# Altium PCB Stencil.PcbDoc (part 1 of 2)
Units mm, origin at the board's own origin, x right, y up, seen from the top; angles counter-clockwise.
Board outline 189.61 x 201.8 mm, 2 copper layers (Top Layer, Bottom Layer); 282 components, 0 nets, 889 pads, 215 vias.
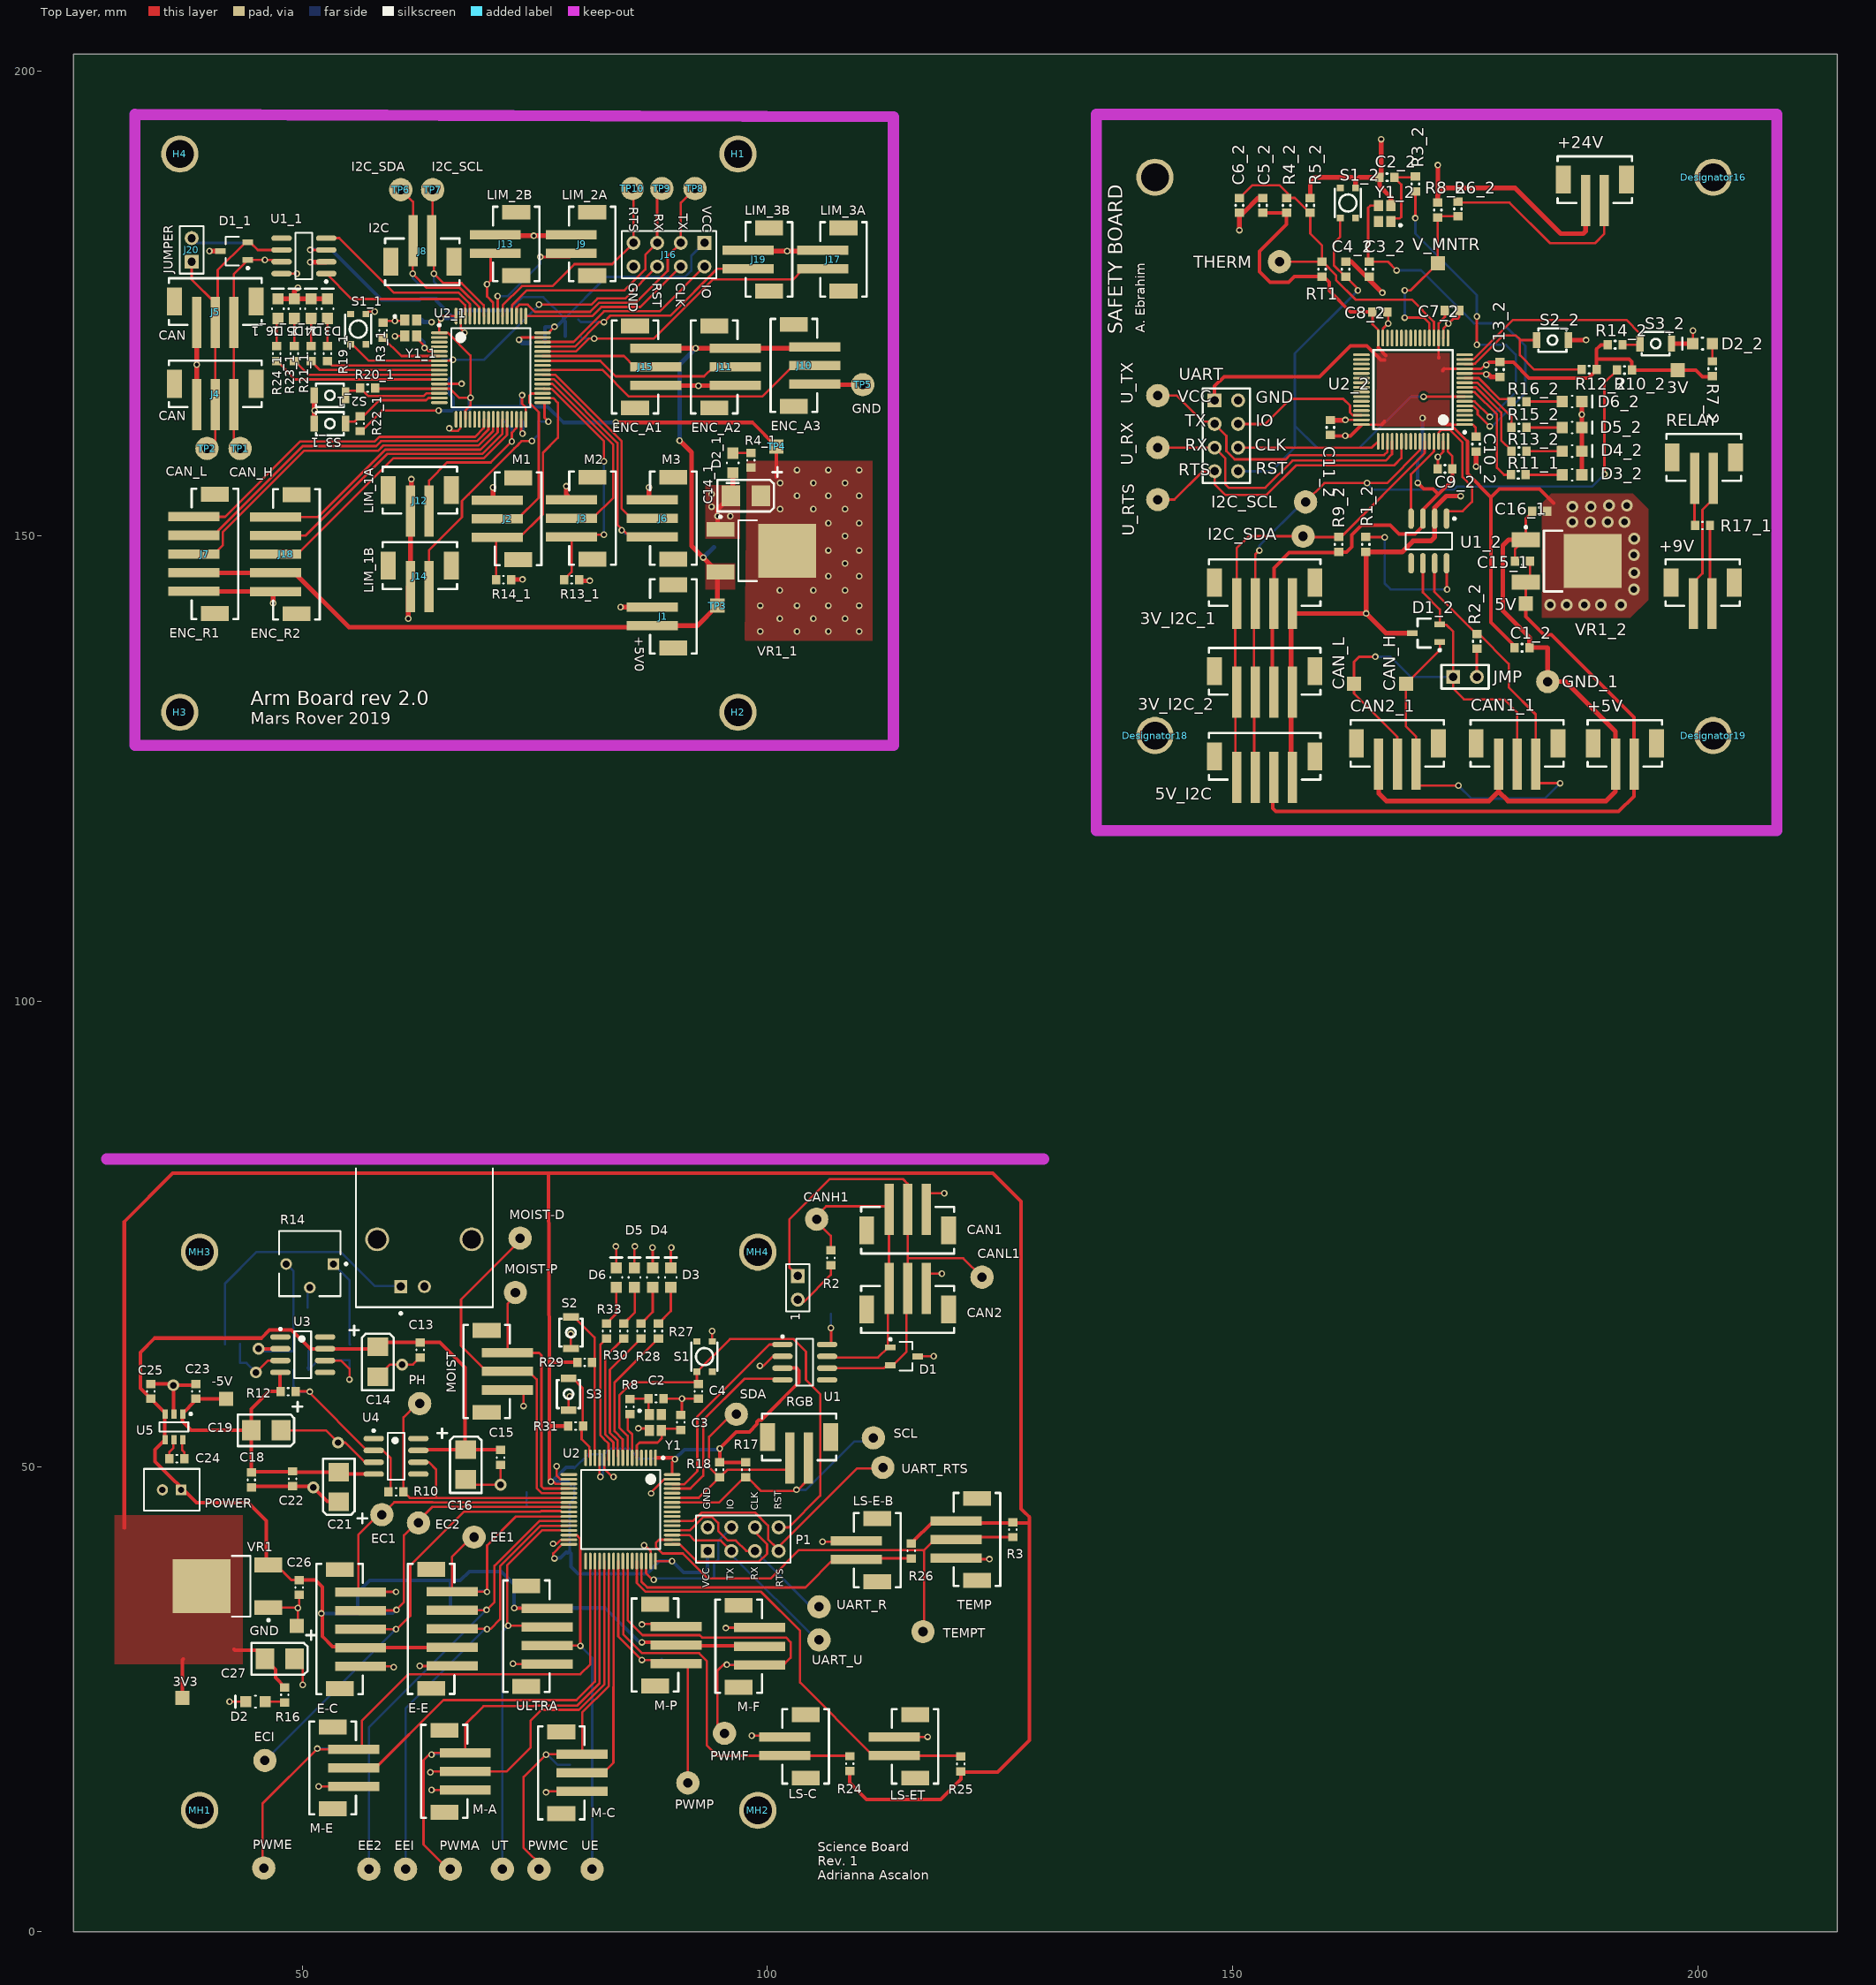
[diagram p0: Top Layer view]
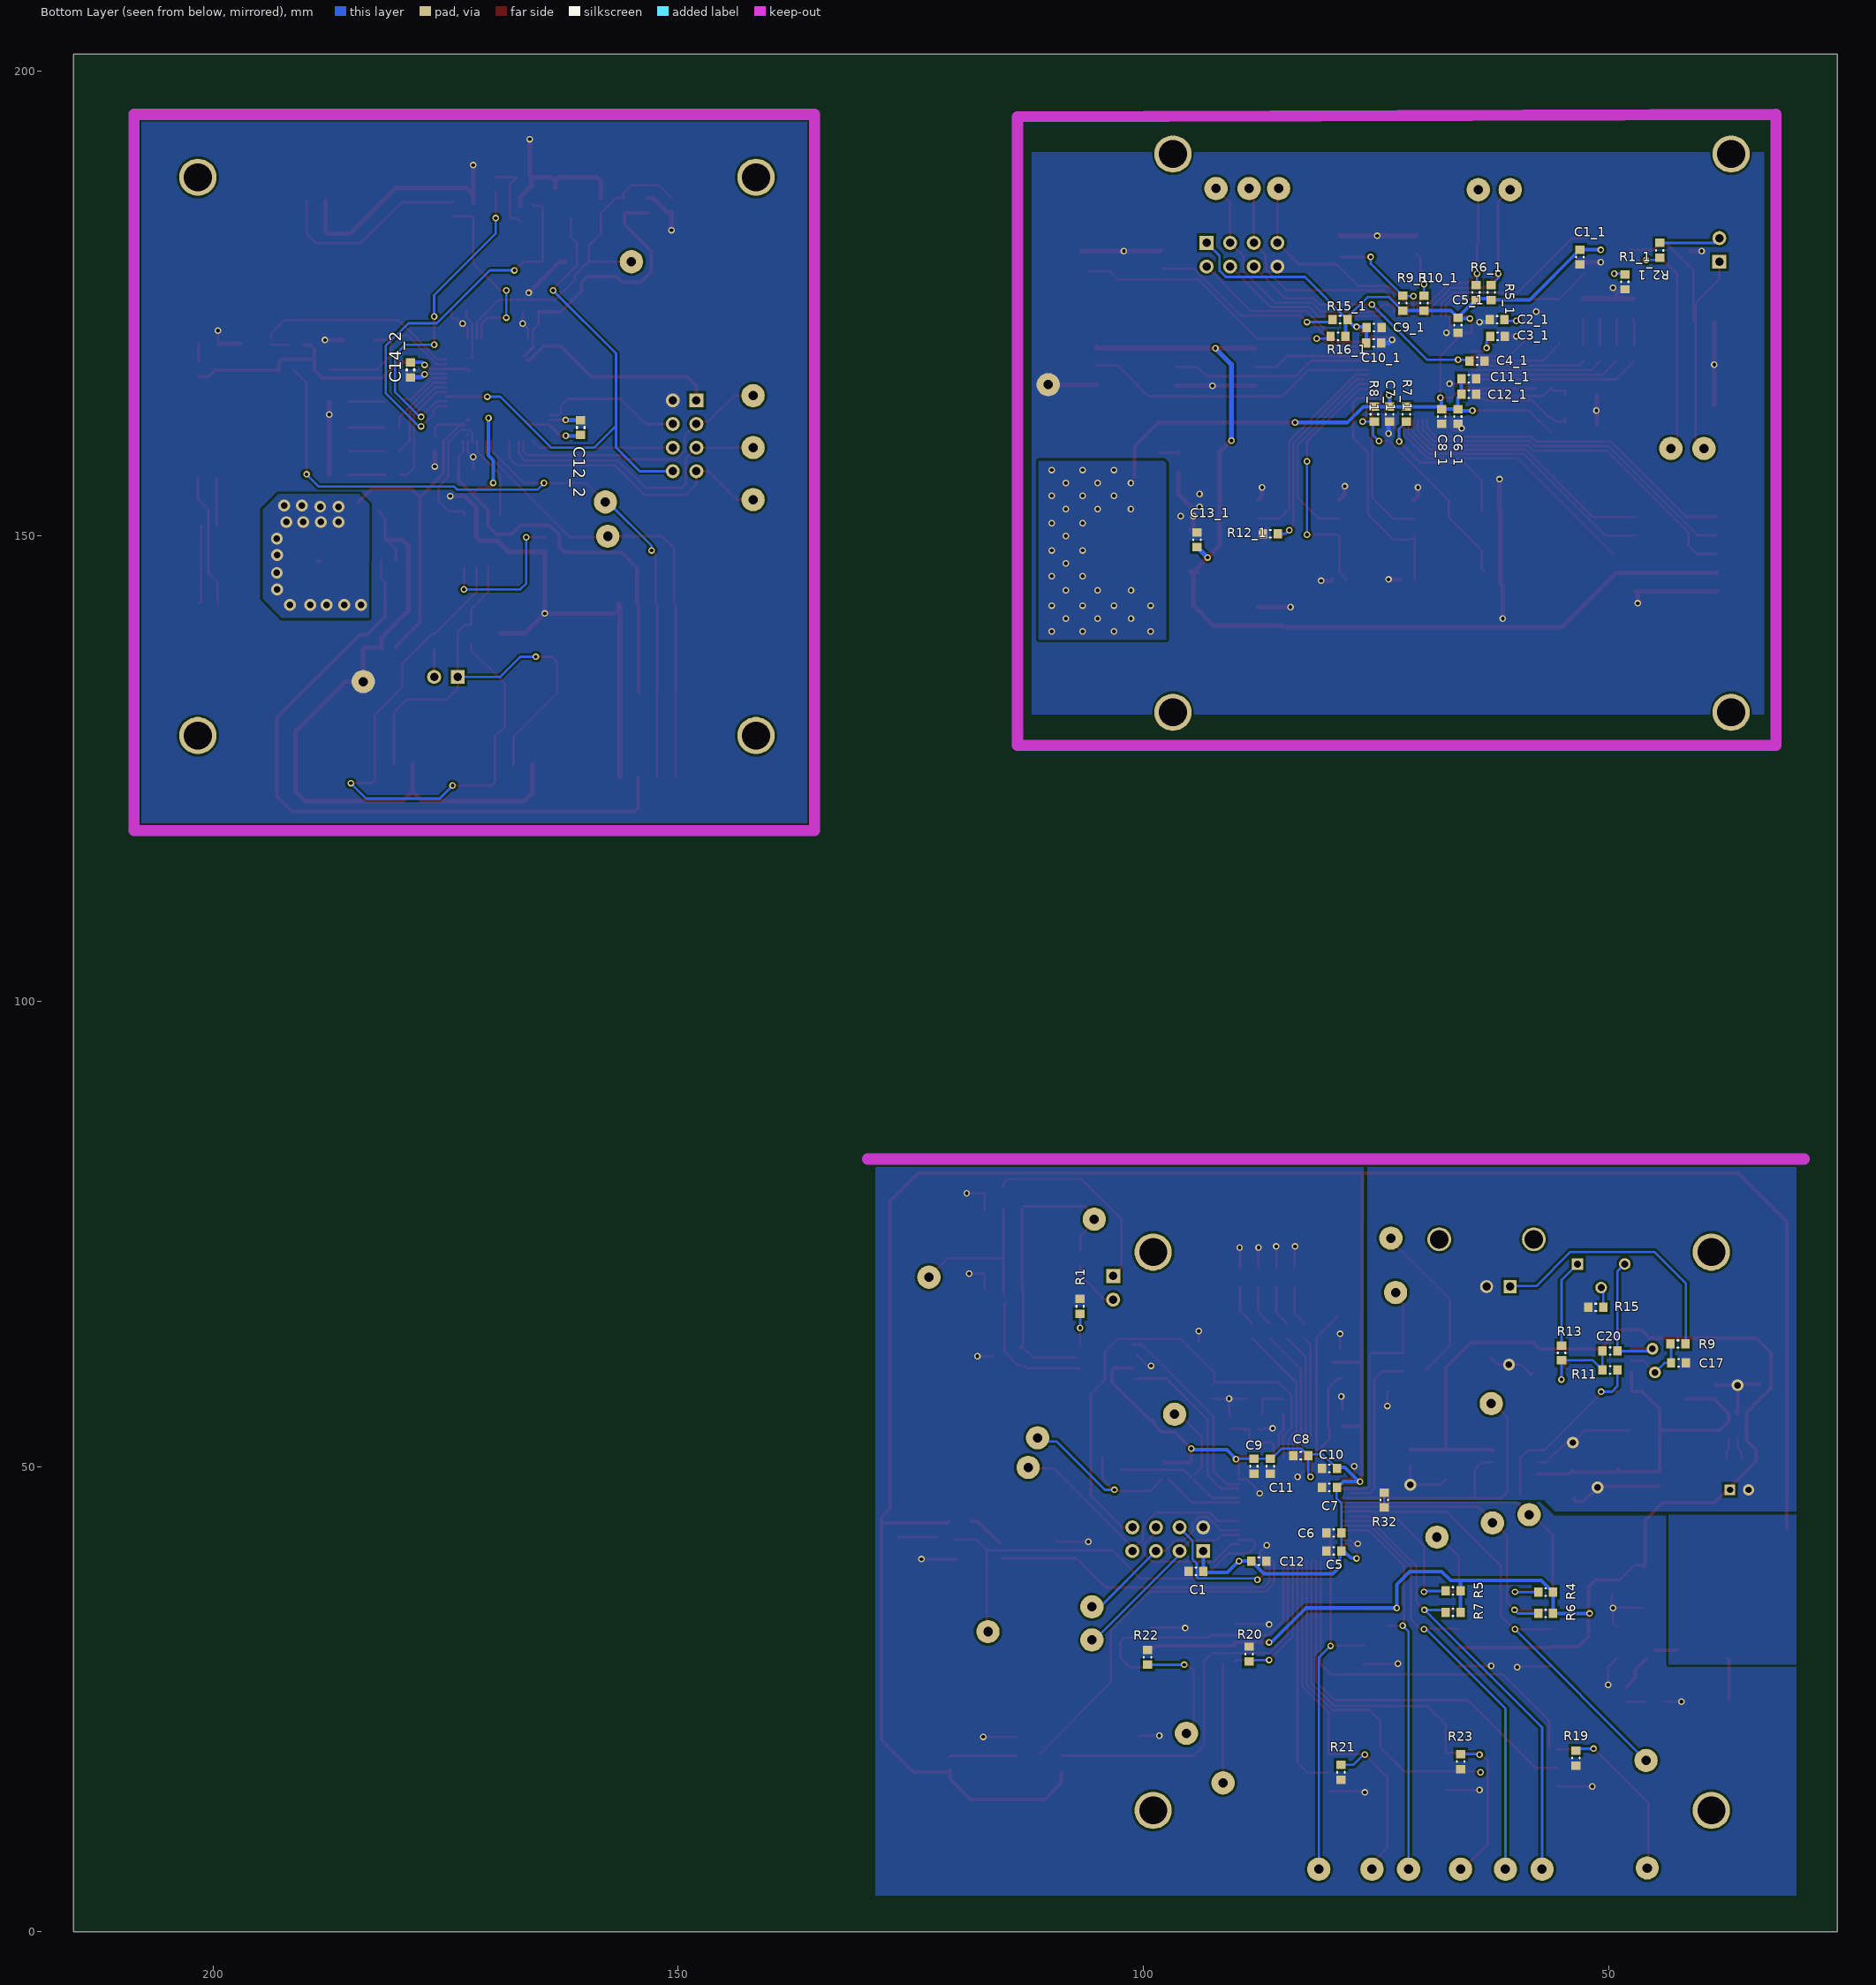
[diagram p1: Bottom Layer view, seen from below]

## Layer stack, top to bottom
Top Solder: solder mask 0.0102, Solder Resist, Dk 3.5
Top Layer: signal copper 0.0356
Dielectric 1: dielectric 0.32, FR-4, Dk 4.8
Bottom Layer: signal copper 0.0356
Bottom Solder: solder mask 0.0102, Solder Resist, Dk 3.5

## Board outline
25.4,0 215.011,0 215.011,201.803 25.4,201.803

## Design rules (kind name [scope] priority, off if disabled: settings)
Clearance [All] p1: gap=0.254 ignorepadtopadclearanceinfootprint=FALSE except(0: Arc-Hole Track-Hole SMDPad-Hole THPad-Hole Via-Hole Fill-Hole Poly-Hole Region-Hole Text-Hole)
PolygonConnect [All] p1: connectstyle=Relief reliefconductorwidth=0.254 reliefentries=4 polygonreliefangle="90 Angle" airgapwidth=0.254
RoutingVias [All] p1: holewidth=0.711 width=1.27 viastyle="Through Hole" minholewidth=0.711 minwidth=1.27 maxholewidth=0.711 maxwidth=1.27
SolderMaskExpansion [All] p1: expansion=0.102
Width [All] p1: maxlimit=0.254 minlimit=0.254 preferedwidth=0.254
30 further rules are at their usual default settings.

## Components (designator, comment, footprint, x,y, rotation, side; value= is the part's Value field where it differs from the comment)
1 "Header 2" HDR1X2 103.251,70.485 r270 top
3V "3V_TP" TESTPOINT#1 197.838,167.836 r90 top (schematic designator TP6)
3V3 "TESTPOINT_SMD" TESTPOINT#1 37.084,25.146 r90 top
3V_I2C_1 "CON_4M_PH_TOP_SMT" JST-B4B-SM4-TB 153.439,147.498 r180 top (schematic designator J5)
3V_I2C_2 "CON_4M_PH_TOP_SMT" JST-B4B-SM4-TB 153.439,137.973 r180 top (schematic designator J6)
5V "5V_TP" TESTPOINT#1 181.514,142.748 r0 top (schematic designator 2)
5V_I2C "CON_4M_PH_TOP_SMT" JST-B4B-SM4-TB 153.439,128.829 r180 top (schematic designator J7)
+5V "PH TOP SMD" JST-B2B-SM4-TB 192.15,130.226 r180 top (schematic designator J3)
+9V "PH TOP SMD" JST-B2B-SM4-TB 200.521,147.498 r180 top (schematic designator J8)
+24V "PH TOP SMD" JST-B2B-SM4-TB 188.932,190.805 r180 top (schematic designator J4)
-5V "TESTPOINT_SMD" TESTPOINT#1 41.783,57.277 r90 top
C1 "CAP_0.1uF_16V_0603" CAPC0603(1608)55_N 94.361,38.735 r180 bottom value=0.1uF
C1_1 "CAP_0.1uF_16V_0603" CAPC0603(1608)55_N 53.086,179.991 r90 bottom value=0.1uF (schematic designator C1)
C1_2 "CAP_0.1uF_16V_0603" CAPC0603(1608)55_N 181.112,137.999 r180 top value=0.1uF (schematic designator C1)
C2 "CAP_15pF_0603" CAPC0603(1608)55_N 88.011,57.288 r180 top locked value=15pF
C2_1 "CAP_15pF_0603" CAPC0603(1608)55_N 61.989,173.25 r180 bottom value=15pF (schematic designator C2)
C2_2 "CAP_15pF_0603" CAPC0603(1608)55_N 166.596,188.566 r0 top value=15pF (schematic designator C2)
C3 "CAP_15pF_0603" CAPC0603(1608)55_N 90.671,54.747 r270 top locked value=15pF
C3_1 "CAP_15pF_0603" CAPC0603(1608)55_N 61.938,171.472 r0 bottom value=15pF (schematic designator C3)
C3_2 "CAP_15pF_0603" CAPC0603(1608)55_N 164.691,178.689 r90 top value=15pF (schematic designator C3)
C4 "CAP_0.1uF_16V_0603" CAPC0603(1608)55_N 92.583,58.088 r90 top locked value=0.1uF
C4_1 "CAP_0.1uF_16V_0603" CAPC0603(1608)55_N 64.135,168.815 r0 bottom value=0.1uF (schematic designator C4)
C4_2 "CAP_0.1uF_16V_0603" CAPC0603(1608)55_N 162.151,178.689 r270 top value=0.1uF (schematic designator C4)
C5 "CAP_0.1uF_16V_0603" CAPC0603(1608)55_N 79.535,40.943 r0 bottom value=0.1uF
C5_1 "CAP_0.1uF_16V_0603" CAPC0603(1608)55_N 66.205,172.669 r90 bottom value=0.1uF (schematic designator C5)
C5_2 "CAP_1uF_16V_0603" CAPC0603(1608)55_N 153.261,185.547 r270 top value=1uF (schematic designator C5)
C6 "CAP_0.1uF_16V_0603" CAPC0603(1608)55_N 79.535,42.848 r0 bottom value=0.1uF
C6_1 "CAP_0.1uF_16V_0603" CAPC0603(1608)55_N 66.205,162.846 r90 bottom value=0.1uF (schematic designator C6)
C6_2 "CAP_10nF_0603" CAPC0603(1608)55_N 150.721,185.547 r90 top value=10nF (schematic designator C6)
C7 "CAP_0.1uF_16V_0603" CAPC0603(1608)55_N 80.01,47.756 r0 bottom value=0.1uF
C7_1 "CAP_0.1uF_16V_0603" CAPC0603(1608)55_N 73.533,163.1 r90 bottom value=0.1uF (schematic designator C7)
C7_2 "CAP_0.1uF_16V_0603" CAPC0603(1608)55_N 173.581,174.244 r180 top value=0.1uF (schematic designator C7)
C8 "CAP_4.7uF_0603" CAPC0603(1608)55_N 83.091,51.164 r180 bottom value=4.7uF
C8_1 "CAP_4.7uF_0603" CAPC0603(1608)55_N 67.945,162.846 r90 bottom value=4.7uF (schematic designator C8)
C8_2 "CAP_0.1uF_16V_0603" CAPC0603(1608)55_N 165.834,174.079 r180 top value=0.1uF (schematic designator C8)
C9 "CAP_0.1uF_16V_0603" CAPC0603(1608)55_N 88.138,50.038 r270 bottom value=0.1uF
C9_1 "CAP_0.1uF_16V_0603" CAPC0603(1608)55_N 75.222,172.415 r0 bottom value=0.1uF (schematic designator C9)
C9_2 "CAP_0.1uF_16V_0603" CAPC0603(1608)55_N 172.819,157.226 r0 top value=0.1uF (schematic designator C9)
C10 "CAP_4.7uF_0603" CAPC0603(1608)55_N 80.01,49.788 r180 bottom value=4.7uF
C10_1 "CAP_0.1uF_16V_0603" CAPC0603(1608)55_N 75.26,170.764 r0 bottom value=0.1uF (schematic designator C10)
C10_2 "CAP_4.7uF_0603" CAPC0603(1608)55_N 176.171,159.893 r90 top value=4.7uF (schematic designator C10)
C11 "CAP_10nF_0603" CAPC0603(1608)55_N 86.36,50.038 r90 bottom value=10nF
C11_1 "CAP_10nF_0603" CAPC0603(1608)55_N 65.024,166.91 r0 bottom value=10nF (schematic designator C11)
C11_2 "CAP_0.1uF_16V_0603" CAPC0603(1608)55_N 160.5,161.671 r270 top value=0.1uF (schematic designator C11)
C12 "CAP_1uF_16V_0603" CAPC0603(1608)55_N 87.592,39.838 r0 bottom value=1uF
C12_1 "CAP_1uF_16V_0603" CAPC0603(1608)55_N 65.024,165.259 r0 bottom value=1uF (schematic designator C12)
C12_2 "CAP_0.1uF_16V_0603" CAPC0603(1608)55_N 160.5,161.662 r270 bottom value=0.1uF (schematic designator C12)
C13 "CAP_0.1uF_50V_0603" CAPC0603(1608)55_N 62.676,62.533 r90 top value=0.1uF
C13_1 "CAP_0.33uF_16V_0603" CAPC0603(1608)55_N 94.234,149.606 r270 bottom value=0.33uF (schematic designator C13)
C13_2 "CAP_10nF_0603" CAPC0603(1608)55_N 178.729,167.894 r90 top value=10nF (schematic designator C13)
C14 "CAP_10uF_0603_POL" AVX-CAPC3528_V 58.104,61.263 r270 top value=10uF
C14_1 "CAP_10uF_0603_POL" AVX-CAPC3528_V 97.676,154.337 r180 top value=10uF (schematic designator C14)
C14_2 "CAP_1uF_16V_0603" CAPC0603(1608)55_N 178.788,167.874 r90 bottom value=1uF (schematic designator C14)
C15 "CAP_0.1uF_50V_0603" CAPC0603(1608)55_N 71.312,50.976 r90 top value=0.1uF
C15_1 "CAP_0.33uF_16V_0603" CAPC0603(1608)55_N 181.161,147.32 r0 top value=0.33uF (schematic designator C15)
C16 "CAP_10uF_0603_POL" AVX-CAPC3528_V 67.564,50.214 r270 top value=10uF
C16_1 "CAP_10uF_0603" CAPC0603(1608)55_N 183.004,152.677 r0 top value=10uF (schematic designator C16)
C17 "CAP_2.2nF_0603" CAPC0603(1608)55_N 42.483,61.136 r0 bottom value=2.2nF
C18 "CAP_0.1uF_50V_0603" CAPC0603(1608)55_N 44.515,48.563 r90 top value=0.1uF
C19 "CAP_10uF_0603_POL" AVX-CAPC3528_V 46.115,53.897 r180 top value=10uF
C20 "CAP_1uF_16V_0603" CAPC0603(1608)55_N 49.849,62.406 r0 bottom value=1uF
C21 "CAP_10uF_0603_POL" AVX-CAPC3528_V 53.913,47.801 r90 top value=10uF
C22 "CAP_0.1uF_50V_0603" CAPC0603(1608)55_N 48.96,48.69 r90 top value=0.1uF
C23 "CAP_1uF_16V_0603" CAPC0603(1608)55_N 38.546,58.088 r90 top value=1uF
C24 "CAP_1uF_16V_0603" CAPC0603(1608)55_N 36.514,50.849 r0 top value=1uF
C25 "CAP_1uF_16V_0603" CAPC0603(1608)55_N 33.72,58.088 r270 top value=1uF
C26 "CAP_0.33uF_16V_0603" CAPC0603(1608)55_N 49.657,37.006 r90 top value=0.33uF
C27 "10uF" AVX-CAPC3528_V 47.574,29.337 r180 top
CAN1 "PH TOP SMD" JST-B3B-SM4-TB 115.062,72.898 r0 top
CAN1_1 "PH TOP SMD" JST-B3B-SM4-TB 180.577,130.226 r180 top (schematic designator J1)
CAN2 "PH TOP SMD" JST-B3B-SM4-TB 115.062,64.389 r0 top locked
CAN2_1 "PH TOP SMD" JST-B3B-SM4-TB 167.7,130.226 r180 top (schematic designator J2)
CAN_H "TESTPOINT_SMD" TESTPOINT#1 168.628,134.112 r0 top (schematic designator TP1)
CAN_L "TESTPOINT_SMD" TESTPOINT#1 163.04,134.112 r90 top (schematic designator TP2)
CANH1 "TESTPOINT_LOOP" TESTPOINT_LOOP#1 105.283,76.581 r0 top
CANL1 "TESTPOINT_LOOP" TESTPOINT_LOOP#1 123.063,70.358 r90 top
D1 "TVS_DIODE_CAN" TVS_DIODE_CAN 114.681,61.849 r0 top
D1_1 "TVS_DIODE_CAN" TVS_DIODE_CAN 42.672,180.626 r180 top (schematic designator D1)
D1_2 "TVS_DIODE_CAN" TVS_DIODE_CAN 170.787,139.573 r180 top (schematic designator D1)
D2 "DIO_LED_R" LED_0805_LINE 44.958,24.736 r180 top
D2_1 "DIO_LED_R" LED_0805_LINE 96.266,157.861 r270 top (schematic designator D2)
D2_2 "DIO_LED_R" LED_0805_LINE 200.505,170.688 r180 top (schematic designator D2)
D3 "DIO_LED_Y" LED_0805_LINE 89.611,70.315 r90 top
D3_1 "DIO_LED_Y" LED_0805_LINE 52.705,174.437 r90 top (schematic designator D3)
D3_2 "DIO_LED_Y" LED_0805_LINE 186.486,156.591 r0 top (schematic designator D3)
D4 "DIO_LED_G" LED_0805_LINE 87.656,70.315 r90 top
D4_1 "DIO_LED_G" LED_0805_LINE 50.927,174.437 r90 top (schematic designator D4)
D4_2 "DIO_LED_G" LED_0805_LINE 186.486,159.131 r0 top (schematic designator D4)
D5 "DIO_LED_G" LED_0805_LINE 85.7,70.315 r90 top
D5_1 "DIO_LED_G" LED_0805_LINE 49.149,174.437 r90 top (schematic designator D5)
D5_2 "DIO_LED_G" LED_0805_LINE 186.486,161.671 r0 top (schematic designator D5)
D6 "DIO_LED_G" LED_0805_LINE 83.745,70.315 r90 top
D6_1 "DIO_LED_G" LED_0805_LINE 47.371,174.437 r90 top (schematic designator D6)
D6_2 "DIO_LED_G" LED_0805_LINE 186.486,164.461 r0 top (schematic designator D6)
Designator16 "Comment" MOUNTING_HOLE#1 201.647,188.566 r0 top
Designator18 "Comment" MOUNTING_HOLE#1 141.647,128.566 r0 top
Designator19 "Comment" MOUNTING_HOLE#1 201.647,128.566 r0 top
E-C "PH TOP SMD" JST-B5B-SM4-TB 51.511,32.529 r270 top
E-E "PH TOP SMD" JST-B5B-SM4-TB 61.341,32.56 r270 top
EC1 "TESTPOINT_LOOP" TESTPOINT_LOOP#1 58.547,44.831 r0 top
EC2 "TESTPOINT_LOOP" TESTPOINT_LOOP#1 62.484,43.942 r0 top
ECI "TESTPOINT_LOOP" TESTPOINT_LOOP#1 45.974,18.415 r0 top
EE1 "TESTPOINT_LOOP" TESTPOINT_LOOP#1 68.453,42.418 r90 top
EE2 "TESTPOINT_LOOP" TESTPOINT_LOOP#1 57.15,6.731 r90 top
EEI "TESTPOINT_LOOP" TESTPOINT_LOOP#1 61.087,6.731 r90 top
GND "TESTPOINT_SMD" TESTPOINT#1 49.403,32.893 r90 top
GND_1 "GND_TP" TESTPOINT_LOOP#1 183.868,134.366 r0 top (schematic designator TP5)
H1 "MOUNTING_HOLES" MOUNTING_HOLE#2 170.434,117.983 r0 top
H2 "MOUNTING_HOLES" MOUNTING_HOLE#3 38.791,148.9 r0 top
H3 "MOUNTING_HOLES" MOUNTING_HOLE#4 159.893,117.983 r0 top
H4 "MOUNTING_HOLES" MOUNTING_HOLE#5 38.791,148.9 r0 top
I2C_SCL "I2C_SCL_TP" TESTPOINT_LOOP#1 157.833,153.67 r0 top (schematic designator TP8)
I2C_SDA "I2C_SDA_TP" TESTPOINT_LOOP#1 157.579,149.987 r0 top (schematic designator TP7)
J1 "+5V0" JST-B2B-SM4-TB 92.38,141.367 r90 top
J2 "M1" JST-B3B-SM4-TB 75.692,151.863 r90 top
J3 "M2" JST-B3B-SM4-TB 83.693,151.924 r90 top
J4 "CAN" JST-B3B-SM4-TB 40.64,168.866 r180 top
J5 "CAN" JST-B3B-SM4-TB 40.64,177.705 r180 top
J6 "M3" JST-B3B-SM4-TB 92.38,151.924 r90 top
J7 "ENC_R1" JST-B5B-SM4-TB 43.104,148.082 r90 top
J8 "I2C" JST-B2B-SM4-TB 62.894,176.983 r0 top
J9 "LIM_2A" JST-B2B-SM4-TB 83.653,181.404 r90 top
J10 "ENC_A3" JST-B3B-SM4-TB 100.33,168.347 r270 top
J11 "ENC_A2" JST-B3B-SM4-TB 91.77,168.18 r270 top
J12 "LIM_1A" JST-B2B-SM4-TB 62.627,157.436 r180 top
J13 "LIM_2B" JST-B2B-SM4-TB 75.489,181.404 r90 top
J14 "LIM_1B" JST-B2B-SM4-TB 62.627,149.329 r180 top
J15 "ENC_A1" JST-B3B-SM4-TB 83.261,168.18 r270 top
J16 "HEADER 4X2" HEADER_2X4 93.218,181.515 r180 top
J17 "LIM_3A" JST-B2B-SM4-TB 110.668,179.737 r90 top
J18 "ENC_R2" JST-B5B-SM4-TB 51.867,148.051 r90 top
J19 "LIM_3B" JST-B2B-SM4-TB 102.667,179.737 r90 top
J20 "JUMPER" HDR1X2 38.1,179.483 r90 top
JMP "Header 2" HDR1X2 173.708,134.874 r0 top (schematic designator 1)
LS-C "PH TOP SMD" JST-B2B-SM4-TB 106.604,19.923 r90 top locked
LS-E-B "PH TOP SMD" JST-B2B-SM4-TB 114.3,41.021 r90 top
LS-ET "PH TOP SMD" JST-B2B-SM4-TB 118.364,19.923 r90 top locked
M-A "PH TOP SMD" JST-B3B-SM4-TB 62.759,17.242 r270 top
M-C "PH TOP SMD" JST-B3B-SM4-TB 75.332,17.086 r270 top
M-E "PH TOP SMD" JST-B3B-SM4-TB 50.757,17.613 r270 top
M-F "PH TOP SMD" JST-B3B-SM4-TB 94.401,30.689 r270 top locked
M-P "PH TOP SMD" JST-B3B-SM4-TB 85.412,30.816 r270 top
MH1 "MOUNTING_HOLES" MOUNTING_HOLE#6 34.671,11.048 r0 top
MH2 "MOUNTING_HOLES" MOUNTING_HOLE#7 150.956,8.048 r0 top
MH3 "MOUNTING_HOLES" MOUNTING_HOLE#8 134.956,14.048 r0 top
MH4 "MOUNTING_HOLES" MOUNTING_HOLE#9 140.33,8.66 r0 top
MOIST "PH TOP SMD" JST-B3B-SM4-TB 67.31,60.224 r270 top
MOIST-D "TESTPOINT_LOOP" TESTPOINT_LOOP#1 73.406,74.549 r90 top
MOIST-P "TESTPOINT_LOOP" TESTPOINT_LOOP#1 72.898,68.707 r90 top
P1 "HEADER 4X2" HEADER_2X4 93.572,40.924 r0 top locked
PH "TESTPOINT_LOOP" TESTPOINT_LOOP#1 62.611,56.769 r90 top
POWER "PH TOP TH" JST-B2B-PHSK 35.957,47.498 r180 top
PWMA "TESTPOINT_LOOP" TESTPOINT_LOOP#1 65.913,6.731 r90 top
PWMC "TESTPOINT_LOOP" TESTPOINT_LOOP#1 75.438,6.731 r90 top
PWME "TESTPOINT_LOOP" TESTPOINT_LOOP#1 45.847,6.858 r90 top
PWMF "TESTPOINT_LOOP" TESTPOINT_LOOP#1 95.377,21.336 r90 top
PWMP "TESTPOINT_LOOP" TESTPOINT_LOOP#1 91.44,16.002 r90 top
R1 "RES_0R_0603" RESC0603(1608)_N 106.807,67.221 r90 bottom value=0R
R1_1 "RES_0R_0603" RESC0603(1608)_N 48.26,177.324 r270 bottom value=0R (schematic designator R1)
R1_2 "RES_0R_0603" RESC0603(1608)_N 164.31,149.098 r270 top value=0R (schematic designator R1)
R2 "RES_120R_0603" RESC0603(1608)_N 106.807,72.428 r270 top value=120R
R2_1 "RES_120R_0603" RESC0603(1608)_N 44.511,180.715 r90 bottom value=120R (schematic designator R2)
R2_2 "RES_120R_0603" RESC0603(1608)_N 176.248,138.684 r270 top value=120R (schematic designator R2)
R3 "RES_4K7_0603" RESC0603(1608)_N 126.365,43.218 r90 top value=4K7
R3_1 "RES_0R_0603" RESC0603(1608)_N 58.674,172.117 r90 top value=0R (schematic designator R3)
R3_2 "RES_0R_0603" RESC0603(1608)_N 169.644,187.833 r90 top value=0R (schematic designator R3)
R4 "RES_10K_0603" RESC0603(1608)_N 56.769,36.498 r180 bottom value=10K
R4_1 "RES_100R_0603" RESC0603(1608)_N 98.203,158.147 r270 top value=100R (schematic designator R4)
R4_2 "RES_78K7_0603" RESC0603(1608)_N 155.801,185.547 r270 top value=78K7 (schematic designator R4)
R5 "RES_10K_0603" RESC0603(1608)_N 66.722,36.633 r180 bottom value=10K
R5_1 "RES_4K7_0603" RESC0603(1608)_N 62.611,176.181 r270 bottom value=4K7 (schematic designator R5)
R5_2 "RES_84K5_0603" RESC0603(1608)_N 158.341,185.547 r270 top value=84K5 (schematic designator R5)
R6 "RES_10K_0603" RESC0603(1608)_N 56.769,34.213 r180 bottom value=10K
R6_1 "RES_4K7_0603" RESC0603(1608)_N 64.262,176.181 r270 bottom value=4K7 (schematic designator R6)
R6_2 "RES_82K_0603" RESC0603(1608)_N 174.216,185.166 r90 top value=82K (schematic designator R6)
R7 "RES_10K_0603" RESC0603(1608)_N 66.722,34.339 r180 bottom value=10K
R7_1 "RES_10K_0603" RESC0603(1608)_N 71.755,163.1 r90 bottom value=10K (schematic designator R7)
R7_2 "RES_100R_0603" RESC0603(1608)_N 201.555,167.985 r270 top value=100R (schematic designator R7)
R8 "RES_0R_0603" RESC0603(1608)_N 85.217,56.437 r90 top value=0R
R8_1 "RES_10K_0603" RESC0603(1608)_N 75.184,163.1 r90 bottom value=10K (schematic designator R8)
R8_2 "RES_10.2K_0603" RESC0603(1608)_N 172.05,185.039 r270 top value=10.2K (schematic designator R8)
R9 "RES_4M7_0603" RESC0603(1608)_N 42.545,63.168 r0 bottom value=4.7M
R9_1 "RES_10K_0603" RESC0603(1608)_N 72.136,175.038 r270 bottom value=10K (schematic designator R9)
R9_2 "RES_4K7_0603" RESC0603(1608)_N 161.389,149.098 r270 top value=4K7 (schematic designator R9)
R10 "RES_30K_0603" RESC0603(1608)_N 60.071,47.293 r0 top value=30K
R10_1 "RES_10K_0603" RESC0603(1608)_N 69.85,175.038 r270 bottom value=10K (schematic designator R10)
R10_2 "RES_4K7_0603" RESC0603(1608)_N 192.123,167.85 r0 top value=4K7 (schematic designator R10)
R11 "RES_30K_0603" RESC0603(1608)_N 49.849,60.374 r180 bottom value=30K
R11_1 "RES_100R_0603" RESC0603(1608)_N 180.699,156.591 r0 top value=100R (schematic designator R11)
R12 "RES_75K_0603" RESC0603(1608)_N 48.476,58.039 r0 top value=75K
R12_1 "RES_10K_0603" RESC0603(1608)_N 86.36,150.241 r180 bottom value=10K (schematic designator R12)
R12_2 "RES_10K_0603" RESC0603(1608)_N 188.313,167.894 r0 top value=10K (schematic designator R12)
R13 "RES_2K2_0603" RESC0603(1608)_N 55.056,62.218 r270 bottom value=2K2
R13_1 "RES_10K_0603" RESC0603(1608)_N 78.943,145.32 r180 top value=10K (schematic designator R13)
R13_2 "RES_100R_0603" RESC0603(1608)_N 180.771,159.131 r0 top value=100R (schematic designator R13)
R14 "POT_5K" 3362P-1-502LF 50.8,71.804 r180 top value=5K
R14_1 "RES_10K_0603" RESC0603(1608)_N 71.628,145.32 r180 top value=10K (schematic designator R14)
R14_2 "RES_10K_0603" RESC0603(1608)_N 191.107,170.561 r0 top value=10K (schematic designator R14)
R15 "RES_1K_0603" RESC0603(1608)_N 51.373,67.105 r180 bottom value=1K
R15_1 "RES_10K_0603" RESC0603(1608)_N 78.867,173.26 r180 bottom value=10K (schematic designator R15)
R15_2 "RES_100R_0603" RESC0603(1608)_N 180.771,161.671 r0 top value=100R (schematic designator R15)
R16 "RES_100R_0603" RESC0603(1608)_N 48.109,25.461 r90 top value=100R
R16_1 "RES_10K_0603" RESC0603(1608)_N 79.083,171.472 r180 bottom value=10K (schematic designator R16)
R16_2 "RES_100R_0603" RESC0603(1608)_N 180.771,164.461 r0 top value=100R (schematic designator R16)
R17 "RES_4K7_0603" RESC0603(1608)_N 97.663,49.657 r90 top value=4K7
R17_1 "RES_750R_0603" RESC0603(1608)_N 200.505,151.13 r180 top value=750R (schematic designator R17)
R18 "RES_4K7_0603" RESC0603(1608)_N 94.869,49.657 r90 top value=4K7
R19 "RES_10K_0603" RESC0603(1608)_N 53.516,18.669 r90 bottom value=10K
R19_1 "RES_100R_0603" RESC0603(1608)_N 52.705,169.611 r90 top value=100R (schematic designator R19)
R20 "RES_10K_0603" RESC0603(1608)_N 88.626,29.845 r270 bottom value=10K
R20_1 "RES_10K_0603" RESC0603(1608)_N 57.023,165.894 r0 top value=10K (schematic designator R20)
R21 "RES_10K_0603" RESC0603(1608)_N 78.753,17.136 r90 bottom value=10K
R21_1 "RES_100R_0603" RESC0603(1608)_N 50.927,169.611 r90 top value=100R (schematic designator R21)
R22 "RES_10K_0603" RESC0603(1608)_N 99.568,29.502 r270 bottom value=10K
R22_1 "RES_10K_0603" RESC0603(1608)_N 56.223,162.084 r90 top value=10K (schematic designator R22)
R23 "RES_10K_0603" RESC0603(1608)_N 65.913,18.288 r90 bottom value=10K
R23_1 "RES_100R_0603" RESC0603(1608)_N 49.149,169.611 r90 top value=100R (schematic designator R23)
R24 "RES_10K_0603" RESC0603(1608)_N 108.839,18.072 r270 top value=10K
R24_1 "RES_100R_0603" RESC0603(1608)_N 47.244,169.611 r90 top value=100R (schematic designator R24)
R25 "RES_10K_0603" RESC0603(1608)_N 120.777,18.034 r270 top value=10K
R26 "RES_10K_0603" RESC0603(1608)_N 115.443,40.932 r90 top value=10K
R27 "RES_100R_0603" RESC0603(1608)_N 88.277,64.568 r90 top value=100R
R28 "RES_100R_0603" RESC0603(1608)_N 86.414,64.568 r90 top value=100R
R29 "RES_10K_0603" RESC0603(1608)_N 80.353,61.214 r180 top value=10K
R30 "RES_100R_0603" RESC0603(1608)_N 84.552,64.568 r90 top value=100R
R31 "RES_10K_0603" RESC0603(1608)_N 79.375,54.356 r0 top value=10K
R32 "RES_0R_0603" RESC0603(1608)_N 74.118,46.404 r90 bottom value=0R
R33 "RES_100R_0603" RESC0603(1608)_N 82.689,64.568 r90 top value=100R
RELAY "PH TOP SMD" JST-B2B-SM4-TB 200.647,160.96 r180 top (schematic designator J9)
RGB "PH TOP SMD" JST-B2B-SM4-TB 103.394,55.677 r180 top
RT1 "NTC_THERM_100K" RESC0603(1608)_N 159.611,178.689 r90 top value=100K
S1 "SW_PWR" PTS830GM140 93.227,61.818 r270 top
S1_1 "SW_PWR" PTS830GM140 56.007,172.244 r270 top (schematic designator S1)
S1_2 "SW_PWR" PTS830GM140 162.385,185.801 r270 top (schematic designator S1)
S2 "SW_TACTILE" B3U-1100P 78.867,64.389 r270 top
S2_1 "SW_TACTILE" B3U-1100P 52.959,165.132 r180 top (schematic designator S2)
S2_2 "SW_TACTILE" B3U-1100P 184.376,171.069 r0 top (schematic designator S2)
S3 "SW_TACTILE" B3U-1100P 78.613,57.785 r270 top
S3_1 "SW_TACTILE" B3U-1100P 52.959,162.084 r180 top (schematic designator S3)
S3_2 "SW_TACTILE" B3U-1100P 195.474,170.688 r0 top (schematic designator S3)
SCL "TESTPOINT_LOOP" TESTPOINT_LOOP#1 111.379,53.086 r0 top
SDA "TESTPOINT_LOOP" TESTPOINT_LOOP#1 96.647,55.626 r0 top
TEMP "PH TOP SMD" JST-B3B-SM4-TB 125.019,42.164 r90 top
TEMPT "TESTPOINT_LOOP" TESTPOINT_LOOP#1 116.713,32.258 r90 top
THERM "THERM_TP" TESTPOINT_LOOP#1 155.039,179.489 r0 top (schematic designator TP3)
TP1 "CAN_H" TESTPOINT_LOOP#1 43.307,159.417 r180 top
TP2 "CAN_L" TESTPOINT_LOOP#1 39.751,159.417 r180 top
TP3 "+5V0" TESTPOINT#2 94.615,142.526 r0 bottom
TP4 "+3V3" TESTPOINT#2 100.965,159.639 r0 bottom
TP5 "GND" TESTPOINT_LOOP#1 110.236,166.275 r270 top
TP6 "I2C_SDA" TESTPOINT_LOOP#1 60.579,187.23 r0 top
TP7 "I2C_SCL" TESTPOINT_LOOP#1 64.008,187.23 r0 top
TP8 "UART_TX" TESTPOINT_LOOP#1 92.202,187.357 r0 top
TP9 "UART_RX" TESTPOINT_LOOP#1 88.646,187.357 r0 top
TP10 "UART_RTS" TESTPOINT_LOOP#1 85.471,187.357 r90 top
U1 "IC TXRX CAN" LT-S8_N 104.006,61.214 r0 top
U1_1 "IC TXRX CAN" LT-S8_N 50.165,180.118 r180 top (schematic designator U1)
U1_2 "IC TXRX CAN" LT-S8_N 171.084,149.479 r270 top (schematic designator U1)
U2 "STM32F091RC" STM_LQFP64_N 84.201,45.388 r270 top locked
U2_1 "STM32F091RC" STM_LQFP64_N 70.269,168.097 r0 top (schematic designator U2)
U2_2 "STM32F091RC" STM_LQFP64_N 169.39,165.735 r180 top (schematic designator U2)
U3 "CA3140AMZ" CA3140AMZ 50.038,62.025 r0 top
U4 "TL081BCDG4" TL081BCDG4 60.071,51.103 r0 top
U5 "LM2776" SOT23-6 36.195,54.278 r270 top
U_RTS "UART_RTS" TESTPOINT_LOOP#2 141.958,154.051 r0 top (schematic designator TP9)
U_RX "UART_RX" TESTPOINT_LOOP#2 141.831,159.512 r90 top (schematic designator TP10)
U_TX "UART_TX" TESTPOINT_LOOP#3 141.704,167.767 r90 top (schematic designator TP11)
UART "HEADER 4X2" HEADER_2X4 148.054,164.592 r270 top (schematic designator P1)
UART_R "TESTPOINT_LOOP" TESTPOINT_LOOP#1 105.537,34.925 r90 top
UART_RTS "TESTPOINT_LOOP" TESTPOINT_LOOP#1 112.395,49.911 r90 top
UART_U "TESTPOINT_LOOP" TESTPOINT_LOOP#1 105.537,31.369 r90 top
UE "TESTPOINT_LOOP" TESTPOINT_LOOP#1 81.153,6.731 r90 top
ULTRA "PH TOP SMD" JST-B4B-SM4-TB 71.577,31.766 r270 top locked
UT "TESTPOINT_LOOP" TESTPOINT_LOOP#1 71.501,6.731 r90 top
V_MNTR "V_MONITOR_TP" TESTPOINT#1 172.05,179.324 r90 top (schematic designator TP4)
VR1 "5V0_3V3_LDO" VOLTAGE_REGULATOR#1 43.561,37.133 r90 top
VR1_1 "5V0_3V3_LDO" VOLTAGE_REGULATOR#1 97.731,148.434 r270 top (schematic designator VR1)
VR1_2 "5V0_3V3_LDO" VOLTAGE_REGULATOR#2 184.304,147.32 r270 top (schematic designator VR1)
Y1 "CRYSTAL_32MHZ" AVX-CX2520DB32000D0GEJZ1-4_V 87.948,54.747 r0 top locked
Y1_1 "CRYSTAL_32MHZ" AVX-CX2520DB32000D0GEJZ1-4_V 61.646,172.361 r0 top (schematic designator Y1)
Y1_2 "CRYSTAL_32MHZ" AVX-CX2520DB32000D0GEJZ1-4_V 166.342,184.658 r180 top (schematic designator Y1)
? "Comment" MOUNTING_HOLE#1 141.647,188.566 r0 top

## Footprints (in the part's own frame and the unit in brackets; to place one, negate y for a bottom-side part, rotate by r counter-clockwise, add the part's x,y. Pads: shape width x height; smd on the part's side, far side on the other; paste and mask are expansions set on the pad)
3362P-1-502LF [mm]
  rect 1.25x1.25 hole 0.75: 1(-2.54,0.035)
  round 1.25 hole 0.75: 2(0,2.575) 3(2.54,0.035)
  silkscreen extent -4.03,-3.49 3.3,3.49, body extent -3.3,-3.49 3.3,3.49, height 4.95
AVX-CAPC3528_V [mm] "SMT Capacitor, 2 Leads, Body 3.5x2.8mm"
  rect 2x2.2 smd: 1(-1.6,0) 2(1.6,0)
  silkscreen extent -3.87,-3.05 3.05,1.7, body extent -1.79,-1.54 1.8,1.54, height 1.9
AVX-CX2520DB32000D0GEJZ1-4_V [mm] "Hand Drawn, 4-Leads,Body 2.5x2mm"
  rect 1x1.2 smd: 1(-0.65,0.85) 2(-0.65,-0.85) 3(0.65,-0.85) 4(0.65,0.85)
  silkscreen extent -1.82,1.13 -1.58,1.38, body extent -1,-1.25 1,1.25, height 0.55
B3U-1100P [mm] "TACTILE SWITCH GREY"
  rect 0.8x1.7 smd: 1(-1.7,0) 2(1.7,0)
  silkscreen extent -1.5,-1.25 1.5,1.25
CA3140AMZ [mm]
  oval 2.2x0.6 smd: 1(-2.4,1.905) 2(-2.4,0.635) 3(-2.4,-0.635) 4(-2.4,-1.905) 5(2.4,-1.905) 6(2.4,-0.635) 7(2.4,0.635) 8(2.4,1.905)
  silkscreen extent -2.52,-2.5 0.9,2.88, body extent -2,-2.5 2,2.5, height 1.75
CAPC0603(1608)55_N [mm] "Chip Capacitor, Body 1.6x0.8mm, Height 0.55mm, IPC Medium Density"
  rect 0.9x1 smd: 1(-0.8,0) 2(0.8,0)
  silkscreen extent -0.05,-0.4 0.05,0.4, body extent -0.87,-0.48 0.88,0.47, height 0.55
HDR1X2 [mm] "Connector; Header; 2 Position"
  rect 1.5x1.5 hole 0.9: 1(0,0)
  round 1.5 hole 0.9: 2(2.54,0)
  silkscreen extent -1.27,-1.27 3.81,1.27
HEADER_2X4 [mm]
  rect 1.5x1.5 hole 0.9: 1(0,0)
  round 1.5 hole 0.9: 2(2.54,0) 3(5.08,0) 4(7.62,0) 5(0,2.54) 6(2.54,2.54) 7(5.08,2.54) 8(7.62,2.54)
  silkscreen extent -1.27,-1.27 8.89,3.81
JST-B2B-PHSK [mm]
  rect 1.162x1.162 / inner rect 1.524x1.524 / far side rect 1.162x1.162 hole 0.7: 1(-1,0)
  round 1.2 / inner round 1.524 / far side round 1.2 hole 0.7: 2(1,0)
  silkscreen extent -3,-2.25 3,2.25
JST-B2B-SM4-TB [mm]
  rect 1x5.5 smd: 1(-1,4.75) 2(1,4.75)
  rect 1.6x3 smd: 3(-3.4,2.5) 4(3.4,2.5)
  silkscreen extent -4,0 4,5
JST-B3B-SM4-TB [mm]
  rect 1x5.5 smd: 1(-2,4.75) 2(0,4.75) 3(2,4.75)
  rect 1.6x3 smd: 4(-4.4,2.5) 5(4.4,2.5)
  silkscreen extent -5,0 5,5
JST-B4B-SM4-TB [mm]
  rect 1x5.5 smd: 1(-3,4.75) 2(-1,4.75) 3(1,4.75) 4(3,4.75)
  rect 1.6x3 smd: 5(-5.4,2.5) 6(5.4,2.5)
  silkscreen extent -6,0 6,5
JST-B5B-SM4-TB [mm]
  rect 1x5.5 smd: 1(-4,4.75) 2(-2,4.75) 3(0,4.75) 4(2,4.75) 5(4,4.75)
  rect 1.6x3 smd: 6(-6.4,2.5) 7(6.4,2.5)
  silkscreen extent -7,0 7,5
LED_0805_LINE [mm] "SMD, 2-Leads, Body 2x1.25mm"
  rect 1.2x1.2 smd: 1(-1.05,0) 2(1.05,0)
  silkscreen extent -0.05,-0.63 2.16,0.64, body extent -1,-0.63 1,0.63, height 0.8
LT-S8_N [mm] "SOP, 8-Leads, Body 4.9x3.9mm, Pitch 1.27mm, IPC Medium Density"
  oval 2.2x0.6 smd: 1(-2.4,1.905) 2(-2.4,0.635) 3(-2.4,-0.635) 4(-2.4,-1.905) 5(2.4,-1.905) 6(2.4,-0.635) 7(2.4,0.635) 8(2.4,1.905)
  silkscreen extent -2.52,-2.5 0.9,2.88, body extent -2,-2.5 2,2.5, height 1.76
MOUNTING_HOLE#1 [mm]
  round 4 hole 3 unplated: 0(0,0)
MOUNTING_HOLE#2 [mm]
  round 4 hole 3 unplated: 0(-73.604,73.081)
MOUNTING_HOLE#3 [mm]
  round 4 hole 3 unplated: 0(58.039,-17.836)
MOUNTING_HOLE#4 [mm]
  round 4 hole 3 unplated: 0(-123.063,13.081)
MOUNTING_HOLE#5 [mm]
  round 4 hole 3 unplated: 0(-1.961,42.164)
MOUNTING_HOLE#6 [mm]
  round 4 hole 3 unplated: 0(4.285,2)
MOUNTING_HOLE#7 [mm]
  round 4 hole 3 unplated: 0(-52,5)
MOUNTING_HOLE#8 [mm]
  round 4 hole 3 unplated: 0(-96,59)
MOUNTING_HOLE#9 [mm]
  round 4 hole 3 unplated: 0(-41.374,64.388)
PTS830GM140 [mm] "PWR TACTILE SWITCH (RED)"
  rect 0.7x0.75 smd: 1(-1.625,0.825) 2(1.625,0.825) 3(-1.625,-0.825) 4(1.625,-0.825)
  silkscreen extent -1.53,-1.4 1.52,1.4
RESC0603(1608)_N [mm] "Chip Resistor, Body 1.6x0.8mm, IPC Medium Density"
  rect 0.9x1 smd: 1(-0.8,0) 2(0.8,0)
  silkscreen extent -0.05,-0.4 0.05,0.4, body extent -0.85,-0.47 0.85,0.47, height 0.6
SOT23-6 [mm] "SOT23, 6-Leads, Body 3.05x1.75mm, Pitch 0.95mm, IPC Medium Density"
  rrect17% 1x0.6 smd: 1(-1.375,0.95) 2(-1.375,0) 3(-1.375,-0.95) 4(1.375,-0.95) 5(1.375,0) 6(1.375,0.95)
  silkscreen extent -1.5,-1.55 0.5,1.93, body extent -1.43,-1.48 1.43,1.49, height 0.9
STM_LQFP64_N [mm] "Thin QFP, 64-Leads, Body 10x10mm, Pitch 0.5mm, IPC Medium Density"
  oval 1.8x0.3 smd mask+0.05: 1(-5.55,3.75) 2(-5.55,3.25) 3(-5.55,2.75) 4(-5.55,2.25) 5(-5.55,1.75) 6(-5.55,1.25) 7(-5.55,0.75) 8(-5.55,0.25) 9(-5.55,-0.25) 10(-5.55,-0.75) 11(-5.55,-1.25) 12(-5.55,-1.75) 13(-5.55,-2.25) 14(-5.55,-2.75) 15(-5.55,-3.25) 16(-5.55,-3.75) 33(5.55,-3.75) 34(5.55,-3.25) 35(5.55,-2.75) 36(5.55,-2.25) 37(5.55,-1.75) 38(5.55,-1.25) 39(5.55,-0.75) 40(5.55,-0.25) 41(5.55,0.25) 42(5.55,0.75) 43(5.55,1.25) 44(5.55,1.75) 45(5.55,2.25) 46(5.55,2.75) 47(5.55,3.25) 48(5.55,3.75)
  oval 0.3x1.8 smd mask+0.05: 17(-3.75,-5.55) 18(-3.25,-5.55) 19(-2.75,-5.55) 20(-2.25,-5.55) 21(-1.75,-5.55) 22(-1.25,-5.55) 23(-0.75,-5.55) 24(-0.25,-5.55) 25(0.25,-5.55) 26(0.75,-5.55) 27(1.25,-5.55) 28(1.75,-5.55) 29(2.25,-5.55) 30(2.75,-5.55) 31(3.25,-5.55) 32(3.75,-5.55) 49(3.75,5.55) 50(3.25,5.55) 51(2.75,5.55) 52(2.25,5.55) 53(1.75,5.55) 54(1.25,5.55) 55(0.75,5.55) 56(0.25,5.55) 57(-0.25,5.55) 58(-0.75,5.55) 59(-1.25,5.55) 60(-1.75,5.55) 61(-2.25,5.55) 62(-2.75,5.55) 63(-3.25,5.55) 64(-3.75,5.55)
  silkscreen extent -5.67,-4.25 4.25,4.7, body extent -5,-5 5,5, height 1.6
TESTPOINT#1 [mil]
  rect 60x60 smd: 1(0,0)
TESTPOINT#2 [mil]
  rect 60x60 smd far side: 1(0,0)
TESTPOINT_LOOP#1 [mm]
  round 2.5 hole 1: 1(0,0)
TESTPOINT_LOOP#2 [mm]
  round 2.5 hole 1: 1(0,-0.127)
TESTPOINT_LOOP#3 [mm]
  round 2.5 hole 1: 1(-2.667,-0.254)
TL081BCDG4 [mm]
  oval 2.2x0.6 smd: 1(-2.4,1.905) 2(-2.4,0.635) 3(-2.4,-0.635) 4(-2.4,-1.905) 5(2.4,-1.905) 6(2.4,-0.635) 7(2.4,0.635) 8(2.4,1.905)
  silkscreen extent -2.52,-2.5 0.9,2.88, body extent -2,-2.5 2,2.5, height 1.75
TVS_DIODE_CAN [mm] "SOT23, 3-Leads, Body 2.95x2.80mm, Pitch 0.95mm, IPC Low Density"
  rect 1.15x0.65 smd: 1(-1.475,0.95) 2(-1.475,-0.95) 3(1.475,0)
  silkscreen extent -1.6,-1.55 0.9,1.95, body extent -1.5,-1.55 1.5,1.55, height 1.25
VOLTAGE_REGULATOR#1 [mm] "DPAK, 3-Leads, Body 6.095x6.54mm, Pitch 4.57mm"
  rect 1.6x3 smd: 1(-2.285,-2.79) 3(2.285,-2.79)
  rect 5.8x6.2 smd: 2(0,4.39)
  silkscreen extent -3.76,-2.92 3.27,1.14, body extent -3.27,-0.84 3.27,5.25, height 2.38
VOLTAGE_REGULATOR#2 [mm] "DPAK, 3-Leads, Body 6.095x6.54mm, Pitch 4.57mm"
  rect 1.6x3 smd: 1(-2.285,-2.79) 3(2.285,-2.79)
  rect 5.8x6.2 smd: 4(0,4.39)
  silkscreen extent -3.76,-2.91 3.27,1.14, body extent -3.27,-0.84 3.27,5.25, height 2.38

## Part data
1 JMP: "Header, 2-Pin", LatestRevisionDate=17-Jul-2002, LatestRevisionNote="Re-released for DXP Platform.", Publisher="Altium Limited"
3V 5V TP3 TP4 V_MNTR: library part TESTPOINT_SMD
3V_I2C_1 3V_I2C_2 5V_I2C: "CONN HEADER PH TOP 4POS 2MM SMD", Digikey Part Number=455-1736-1-ND, Manufacturer=JST, MPN=B4B-PH-SM4-TB(LF)(SN), ComponentLink1Description=Datasheet, ComponentLink1URL=http://www.jst-mfg.com/product/pdf/eng/ePH.pdf
+5V +9V +24V LS-C LS-E-B LS-ET RELAY RGB: library part CON_2M_PH_TOP_SMT, "CONN HEADER PH TOP 2POS 2MM SMD", Manufacturer=JST, Part Number=B2B-PH-SM4-TB, ComponentLink1Description=Datasheet, ComponentLink1URL=http://www.jst-mfg.com/product/pdf/eng/ePH.pdf
C1 C1_1 C4 C4_1 C5 C5_1 C6 C6_1 C7 C7_1 C9 C9_1 C10_1: "CAP CER 0.1UF 16V X7R 0603", Digikey Part Number=311-1088-1-ND, Manufacturer=Yageo, MPN=CC0603KRX7R7BB104, Package="0603 (1608 Metric)", Temperature Coefficient=X7R, Voltage Rating=16V, Dimensions="0.063\" L x 0.031\" W (1.60mm x 0.80mm)"
C1_2 C4_2 C7_2 C8_2 C9_2 C11_2 C12_2: "CAP CER 0.1UF 16V X7R 0603", Manufacturer=Yageo, Package="0603 (1608 Metric)", Part Number=CC0603KRX7R7BB104, Temperature Coefficient=X7R, Voltage Rating=16V, Dimensions="0.063\" L x 0.031\" W (1.60mm x 0.80mm)"
C2 C2_1 C3 C3_1: "CAP CER 15PF 250V NPO 0603", Digikey Part Number=311-3282-1-ND, Manufacturer=Yageo, MPN=AC0603JRNPOYBN150, Package="0603 (1608 Metric)", Temperature Coefficient=NP0, Voltage Rating=250v, Dimensions="0.063\" L x 0.031\" W (1.60mm x 0.80mm)"
C2_2 C3_2: "CAP CER 15PF 250V NPO 0603", Manufacturer=Yageo, Package="0603 (1608 Metric)", Part Number=AC0603JRNPOYBN150, Temperature Coefficient=NP0, Voltage Rating=250v, Dimensions="0.063\" L x 0.031\" W (1.60mm x 0.80mm)"
C5_2 C14_2: "CAP CER 1UF 16V Y5V 0603", Manufacturer=Yageo, Package="0603 (1608 Metric)", Part Number=CC0603ZRY5V7BB105, Temperature Coefficient=Y5V, Voltage Rating=16V, Dimensions="0.063\" L x 0.031\" W (1.60mm x 0.80mm)"
C6_2 C13_2: "CAP CER 10000PF 16V X7R 0603", Manufacturer=Yageo, Package="0603 (1608 Metric)", Part Number=CC0603KRX7R7BB103, Temperature Coefficient=X7R, Voltage Rating=16V, Dimensions="0.063\" L x 0.031\" W (1.60mm x 0.80mm)"
C8 C8_1 C10: "CAP CER 4.7UF 6.3V X5R 0603", Digikey Part Number=311-1521-1-ND, Manufacturer=Yageo, MPN=CC0603KRX5R5BB475, Package="0603 (1608 Metric)", Temperature Coefficient=X5R, Voltage Rating=6.3V, Dimensions="0.063\" L x 0.031\" W (1.60mm x 0.80mm)"
C10_2: "CAP CER 4.7UF 6.3V X5R 0603", Manufacturer=Yageo, Package="0603 (1608 Metric)", Part Number=CC0603KRX5R5BB475, Temperature Coefficient=X5R, Voltage Rating=6.3V, Dimensions="0.063\" L x 0.031\" W (1.60mm x 0.80mm)"
C11 C11_1: "CAP CER 10000PF 16V X7R 0603", Digikey Part Number=311-3369-1-ND, Manufacturer=Yageo, MPN=CC0603KRX7R7BB103, Package="0603 (1608 Metric)", Temperature Coefficient=X7R, Voltage Rating=16V, Dimensions="0.063\" L x 0.031\" W (1.60mm x 0.80mm)"
C12 C12_1 C20 C23 C24 C25: "CAP CER 1UF 16V Y5V 0603", Digikey Part Number=311-1372-1-ND, Manufacturer=Yageo, MPN=CC0603ZRY5V7BB105, Package="0603 (1608 Metric)", Temperature Coefficient=Y5V, Voltage Rating=16V, Dimensions="0.063\" L x 0.031\" W (1.60mm x 0.80mm)"
C13 C15 C18 C22: "CAP CER 0.1UF 50V X7R 0603", Digikey Part Number=311-1344-1-ND, Manufacturer=Yageo, MPN=CC0603KRX7R9BB104, Package="0603 (1608 Metric)", Temperature Coefficient=X7R, Voltage Rating=50V, Dimensions="0.063\" L x 0.031\" W (1.60mm x 0.80mm)"
C13_1 C26: "CAP CER 0.33UF 16V X7R 0603", Digikey Part Number=490-6050-1-ND, Manufacturer="Murata Electronics North America", MPN=GCM188R71C334KA37D, Package="0603 (1608 Metric)", Temperature Coefficient=X7R, Voltage Rating=16V, Dimensions="0.063\" L x 0.031\" W (1.60mm x 0.80mm)"
C14 C16 C19 C21: "Capacitor, Tantalum, 10uF 10% 20V MCCT-B (3528)", Manufacturer=Yageo, Package="0603 (1608 Metric)", Part Number=CC0603MRX5R6BB106, Temperature Coefficient=X5R, Voltage Rating=10V, Dimensions="0.063\" L x 0.031\" W (1.60mm x 0.80mm)"
C14_1: "Capacitor, Tantalum, 10uF 10% 20V MCCT-B (3528)", Digikey Part Number=311-1817-1-ND, Manufacturer=Yageo, MPN=CC0603MRX5R6BB106, Package="0603 (1608 Metric)", Temperature Coefficient=X5R, Voltage Rating=10V, Dimensions="0.063\" L x 0.031\" W (1.60mm x 0.80mm)"
C15_1: "CAP CER 0.33UF 16V X7R 0603", Manufacturer="Murata Electronics North America", Package="0603 (1608 Metric)", Part Number=GRM188R71C334KA01D, Temperature Coefficient=X7R, Voltage Rating=16V, Dimensions="0.063\" L x 0.031\" W (1.60mm x 0.80mm)"
C16_1: "CAP CER 10UF 10V X5R 0603", Manufacturer=Yageo, Package="0603 (1608 Metric)", Part Number=CC0603MRX5R6BB106, Temperature Coefficient=X5R, Voltage Rating=10V, Dimensions="0.063\" L x 0.031\" W (1.60mm x 0.80mm)"
C17: "CAP CER 2.2NF 25V X7R 0603", Digikey Part Number=311-3653-1-ND, Manufacturer=Yageo, MPN=CC0603KRX7R8BB222, Package="0603 (1608 Metric)", Temperature Coefficient=X7R, Voltage Rating=25V, Dimensions="0.063\" L x 0.031\" W (1.60mm x 0.80mm)"
C27: library part CAP_10uF_0603, "CAP CER 10UF 10V X5R 0603", Digikey Part Number=311-1817-1-ND, Manufacturer=Yageo, MPN=CC0603MRX5R6BB106, Package="0603 (1608 Metric)", Voltage Rating=10V, Dimensions="0.063\" L x 0.031\" W (1.60mm x 0.80mm)"
CAN1 CAN1_1 CAN2 CAN2_1 M-A M-C M-E M-F M-P MOIST TEMP: library part CON_3M_PH_TOP_SMT, "CONN HEADER PH TOP 3POS 2MM SMD", Manufacturer=JST, Part Number=B3B-PH-SM4-TB, ComponentLink1Description=Datasheet, ComponentLink1URL=http://www.jst-mfg.com/product/pdf/eng/ePH.pdf
D1 D1_1: "TVS DIODE 24V 41V SOT323-3", Digikey Part Number=1727-3891-1-ND, Manufacturer="Nexperia USA Inc.", MPN=PESD2CAN,215, Package="SC-70, SOT-323", ComponentLink1Description=Datasheet, ComponentLink1URL=https://assets.nexperia.com/documents/data-sheet/PESD1CAN-U.pdf
D1_2: "TVS DIODE 24V 41V SOT323-3", Manufacturer="Nexperia USA Inc.", Package="SC-70, SOT-323", Part Number=PESD2CAN,215, ComponentLink1Description=Datasheet, ComponentLink1URL=https://assets.nexperia.com/documents/data-sheet/PESD1CAN-U.pdf
D2 D2_1: "LED RED DIFFUSED 0805 SMD", Digikey Part Number=475-1278-1-ND, Forward Voltage Drop=2V, Manufacturer=OSRAM, MPN="LS R976-NR-1", Package="0805 (2012 Metric)"
D2_2: "LED RED DIFFUSED 0805 SMD", Forward Voltage Drop=2V, Manufacturer=OSRAM, Package="0805 (2012 Metric)", Part Number="LS R976-NR-1"
D3 D3_1: "LED YELLOW DIFFUSED 0805 SMD", Digikey Part Number=475-2560-1-ND, Forward Voltage Drop=2.2V, Manufacturer=OSRAM, MPN="LY R976-PS-36", Package="0805 (2012 Metric)"
D3_2: "LED YELLOW DIFFUSED 0805 SMD", Forward Voltage Drop=2.2V, Manufacturer=OSRAM, Package="0805 (2012 Metric)", Part Number="LY R976-PS-36"
D4 D4_1 D5 D5_1 D6 D6_1: "LED GREEN DIFFUSED 0805 SMD", Digikey Part Number=475-1410-1-ND, Forward Voltage Drop=2.2V, Manufacturer=OSRAM, MPN="LG R971-KN-1", Package="0805 (2012 Metric)"
D4_2 D5_2 D6_2: "LED GREEN DIFFUSED 0805 SMD", Forward Voltage Drop=2.2V, Manufacturer=OSRAM, Package="0805 (2012 Metric)", Part Number="LG R971-KN-1"
E-C E-E: library part CON_5M_PH_TOP_SMT, "CONN HEADER PH TOP 5POS 2MM SMD", Manufacturer=JST, Part Number=B5B-PH-SM4-TB, ComponentLink1Description=Datasheet, ComponentLink1URL=http://www.jst-mfg.com/product/pdf/eng/ePH.pdf
GND_1 I2C_SCL I2C_SDA THERM U_RTS U_RX U_TX: library part TESTPOINT_LOOP
H1 H2 H3 H4 MH1 MH2 MH3 MH4: "6cm x 6cm"
J1 J8 J9 J12 J13 J14 J17 J19: library part CON_2M_PH_TOP_SMT, "CONN HEADER PH TOP 2POS 2MM SMD", Digikey Part Number=455-1734-1-ND, Manufacturer=JST, MPN=B2B-PH-SM4-TB, ComponentLink1Description=Datasheet, ComponentLink1URL=http://www.jst-mfg.com/product/pdf/eng/ePH.pdf
J2 J3 J4 J5 J6 J10 J11 J15: library part CON_3M_PH_TOP_SMT, "CONN HEADER PH TOP 3POS 2MM SMD", Digikey Part Number=455-1735-1-ND, Manufacturer=JST, MPN=B3B-PH-SM4-TB(LF)(SN), ComponentLink1Description=Datasheet, ComponentLink1URL=http://www.jst-mfg.com/product/pdf/eng/ePH.pdf
J7 J18: library part CON_5M_PH_TOP_SMT, "CONN HEADER PH TOP 5POS 2MM SMD", Digikey Part Number=455-1737-1-ND, Manufacturer=JST, MPN=B5B-PH-SM4-TB(LF)(SN), ComponentLink1Description=Datasheet, ComponentLink1URL=http://www.jst-mfg.com/product/pdf/eng/ePH.pdf
J16 P1: "Header, 4-Pin Dual row", Digikey Part Number=S9015E-04-ND, Manufacturer="Sullins Connector Solutions", MPN=GRPB042VWVN-RC
J20: library part JUMPER_2, "HEADER 2X1"
POWER: library part CON_2M_PH_TOP_TH, "CONN HEADER PH TOP 2POS 2MM", Manufacturer=JST, Part Number=B2B-PH-K-S, ComponentLink1Description=Datasheet, ComponentLink1URL=http://www.jst-mfg.com/product/pdf/eng/ePH.pdf
R1 R1_1 R3_1 R8 R32: "RES SMD 0 OHM JUMPER 1/10W 0603", Digikey Part Number=311-0.0GRCT-ND, Manufacturer=Yageo, MPN=RC0603JR-070RL, Package="0603 (1608 Metric)", Dimensions="0.063\" L x 0.031\" W (1.60mm x 0.80mm)"
R1_2 R3_2: "RES SMD 0 OHM JUMPER 1/10W 0603", Manufacturer=Yageo, Package="0603 (1608 Metric)", Part Number (MPN)=RC0603JR-070RL, Dimensions="0.063\" L x 0.031\" W (1.60mm x 0.80mm)"
R2 R2_1: "RES SMD 120 OHM 5% 1/10W 0603", Digikey Part Number=311-120GRCT-ND, Manufacturer=Yageo, MPN=RC0603JR-07120RL, Package="0603 (1608 Metric)", Tolerance=5%, Dimensions="0.063\" L x 0.031\" W (1.60mm x 0.80mm)"
R2_2: "RES SMD 120 OHM 5% 1/10W 0603", Manufacturer=Yageo, Package="0603 (1608 Metric)", Part Number (MPN)=RC0603JR-07120RL, Tolerance=5%, Dimensions="0.063\" L x 0.031\" W (1.60mm x 0.80mm)"
R3 R5_1 R6_1 R17 R18: "RES SMD 4.7K OHM 5% 1/10W 0603", Digikey Part Number=311-4.7KGRCT-ND, Manufacturer=Yageo, MPN=RC0603JR-074K7L, Package="0603 (1608 Metric)", Tolerance=5%, Dimensions="0.063\" L x 0.031\" W (1.60mm x 0.80mm)"
R4 R5 R6 R7 R7_1 R8_1 R9_1 R10_1 R12_1 R13_1 R14_1 R15_1 R16_1 R19 R20 R20_1 R21 R22 R22_1 R23 R24 R25 R26 R29 R31: "RES SMD 10K OHM 5% 1/10W 0603", Digikey Part Number=311-10KGRCT-ND, Manufacturer=Yageo, MPN=RC0603JR-0710KL, Package="0603 (1608 Metric)", Tolerance=5%, Dimensions="0.063\" L x 0.031\" W (1.60mm x 0.80mm)"
R4_1 R16 R19_1 R21_1 R23_1 R24_1 R27 R28 R30 R33: "RES SMD 100 OHM 1% 1/10W 0603", Digikey Part Number=311-100HRCT-ND, Manufacturer=Yageo, MPN=RC0603FR-07100RL, Package="0603 (1608 Metric)", Tolerance=1%, Dimensions="0.063\" L x 0.031\" W (1.60mm x 0.80mm)"
R4_2: "RES SMD 78.7K OHM 1% 1/10W 0603", Digikey Part Number=311-78.7KHRCT-ND, Manufacturer=Yageo, Package="0603 (1608 Metric)", Part Number (MPN)=RC0603FR-0778K7L, Tolerance=1%, Dimensions="0.063\" L x 0.031\" W (1.60mm x 0.80mm)"
R5_2: "RES SMD 84.5K OHM 1% 1/10W 0603", Digikey Part Number=311-84.5KHRCT-ND, Manufacturer=Yageo, Package="0603 (1608 Metric)", Part Number (MPN)=RC0603FR-0784K5L, Tolerance=1%, Dimensions="0.063\" L x 0.031\" W (1.60mm x 0.80mm)"
R6_2: library part RES_634K_0603, "RES SMD 82K OHM 1% 1/10W 0603", Digikey Part Number=311-634KHRCT-ND, Manufacturer=Yageo, Package="0603 (1608 Metric)", Part Number (MPN)=RC0603FR-07634KL, Tolerance=1%, Dimensions="0.063\" L x 0.031\" W (1.60mm x 0.80mm)"
R7_2 R11_1 R13_2 R15_2 R16_2: "RES SMD 100 OHM 1% 1/10W 0603", Manufacturer=Yageo, Package="0603 (1608 Metric)", Part Number (MPN)=RC0603FR-07100RL, Tolerance=1%, Dimensions="0.063\" L x 0.031\" W (1.60mm x 0.80mm)"
R8_2: library part RES_100K_0603, "RES SMD 10.2K OHM 5% 1/10W 0603", Digikey Part Number=311-261KHRCT-ND, Manufacturer=Yageo, Package="0603 (1608 Metric)", Part Number (MPN)=RC0603FR-07261KL, Tolerance=5%, Dimensions="0.063\" L x 0.031\" W (1.60mm x 0.80mm)"
R9: "RES SMD 4.7M OHM 1% 1/10W 0603", Digikey Part Number=311-4.70MHRCT-ND, Manufacturer=Yageo, MPN=RC0603FR-074M7L, Package="0603 (1608 Metric)", Tolerance=1%, Dimensions="0.063\" L x 0.031\" W (1.60mm x 0.80mm)"
R9_2 R10_2: "RES SMD 4.7K OHM 5% 1/10W 0603", Manufacturer=Yageo, Package="0603 (1608 Metric)", Part Number (MPN)=RC0603JR-074K7L, Tolerance=5%, Dimensions="0.063\" L x 0.031\" W (1.60mm x 0.80mm)"
R10 R11: "RES SMD 30K OHM 0.5% 1/10W 0603", Digikey Part Number=311-30KDCT-ND, Manufacturer=Yageo, MPN=RT0603DRD0730KL, Package="0603 (1608 Metric)", Tolerance=0.5%, Dimensions="0.063\" L x 0.031\" W (1.60mm x 0.80mm)"
R12: "RES SMD 75K OHM 0.5% 1/10W 0603", Digikey Part Number=311-75KDCT-ND, Manufacturer=Yageo, MPN=RT0603DRD0775KL, Package="0603 (1608 Metric)", Tolerance=0.5%, Dimensions="0.063\" L x 0.031\" W (1.60mm x 0.80mm)"
R12_2 R14_2: "RES SMD 10K OHM 5% 1/10W 0603", Manufacturer=Yageo, Package="0603 (1608 Metric)", Part Number (MPN)=RC0603JR-0710KL, Tolerance=5%, Dimensions="0.063\" L x 0.031\" W (1.60mm x 0.80mm)"
R13: "RES SMD 2.2K OHM 1% 1/10W 0603", Digikey Part Number=311-2.20KHRCT-ND, Manufacturer=Yageo, MPN=RC0603FR-072K2L, Package="0603 (1608 Metric)", Tolerance=1%, Dimensions="0.063\" L x 0.031\" W (1.60mm x 0.80mm)"
R14: "TRIMMER 5K OHM 0.5W PC PIN TOP", Digikey Part Number=3362P-502LF-ND, Manufacturer="Bourns Inc.", MPN=3362P-1-502LF, Tolerance=10%, Dimensions="0.275\" x 0.260\" Face x 0.185\" H (6.99mm x 6.60mm x 4.70mm)"
R15: "RES SMD 1K OHM 5% 1/10W 0603", Digikey Part Number=311-1.0KGRCT-ND, Manufacturer=Yageo, MPN=RC0603JR-071KL, Package="0603 (1608 Metric)", Tolerance=5%, Dimensions="0.063\" L x 0.031\" W (1.60mm x 0.80mm)"
R17_1: "RES SMD 750 OHM 0.5% 1/10W 0603", Digikey Part Number=311-750GRCT-ND, Manufacturer=Yageo, MPN=RC0603JR-07750RL, Package="0603 (1608 Metric)", Tolerance=5%, Dimensions="0.063\" L x 0.031\" W (1.60mm x 0.80mm)"
RT1: "THERM NTC 100KOHM 4700K 0603", Digikey Part Number=P10555CT-ND, Manufacturer=Panasonic, MPN=ERT-J1VV104J
S1 S1_1: "Power Switch (Red)", Digikey Part Number=CKN10587CT-ND, Manufacturer=C&K, MPN="PTS830GM140 SMTR LFS", ComponentLink1Description=Datasheet, ComponentLink1URL=https://www.ckswitches.com/media/1478/pts830.pdf
S1_2: "Power Switch (Red)", Part Number="PTS830GM140 SMTR LFS", ComponentLink1Description=Datasheet, ComponentLink1URL=https://www.ckswitches.com/media/1478/pts830.pdf
S2 S2_1 S3 S3_1: "Tactile Switch (Grey)", Digikey Part Number=SW1021TR-ND, Manufacturer="Omron Electronics Inc-EMC Div", MPN=B3U-1100P
S2_2 S3_2: "Tactile Switch (Grey)", Digikey Part Number=SW1021TR-ND, Manufacturer Part Number=B3U-1100P
TP1 TP2 TP5 TP6 TP7 TP8 TP9 TP10: library part TESTPOINT_LOOP, "PC TEST POINT MINIATURE WHITE", Digikey Part Number=36-5002-ND, Manufacturer="Keystone Electronics", MPN=5002
U1 U1_1: library part LTC2875, "IC TXRX CAN 4MBPS 8SO", Digikey Part Number=LTC2875IS8#PBF-ND, Manufacturer="Linear Technologies", MPN=LTC2875IS8#PBF, Package="8-SOIC (0.154\", 3.90mm Width)", ComponentLink1Description=Datasheet, ComponentLink1URL=https://www.analog.com/media/en/technical-documentation/data-sheets/2875f.pdf
U1_2: library part LTC2875, "IC TXRX CAN 4MBPS 8SO", Manufacturer="Linear Technologies", Package="8-SOIC (0.154\", 3.90mm Width)", Part Number=LTC2875IS8#PBF, ComponentLink1Description=Datasheet, ComponentLink1URL=https://www.analog.com/media/en/technical-documentation/data-sheets/2875f.pdf
U2 U2_1: Digikey Part Number=497-15167-ND, Manufacturer=STMicroelectronics, Package=64-LQFP, ComponentLink1Description=Datasheet, ComponentLink1URL=https://www.st.com/content/ccc/resource/technical/document/datasheet/95/3c/2e/5b/21/09/45/a6/DM00115237.pdf/files/DM00115237.pdf/jcr:content/translations/en.DM00115237.pdf#%5B%7B%22num%22%3A96%2C%22gen%22%3A0%7D%2C%7B%22name%22%3A%22XYZ%22%7D%2C67%2C755%2Cnull%5D, MPN=STM32F091RC
U2_2: Manufacturer=STMicroelectronics, Package=64-LQFP, ComponentLink1Description=Datasheet, ComponentLink1URL=https://www.st.com/content/ccc/resource/technical/document/datasheet/95/3c/2e/5b/21/09/45/a6/DM00115237.pdf/files/DM00115237.pdf/jcr:content/translations/en.DM00115237.pdf#%5B%7B%22num%22%3A96%2C%22gen%22%3A0%7D%2C%7B%22name%22%3A%22XYZ%22%7D%2C67%2C755%2Cnull%5D, Part Number=STM32F091RC
U3: "4.5MHz, BiMOS Operational Amplifier with MOSFET Input/Bipolar Output", Digikey Part Number=CA3140AMZ-ND, Manufacturer="Renesas Electronics America Inc.", MPN=CA3140AMZ
U4: "IC OPAMP JFET 3MHZ 8SOIC", Digikey Part Number=296-34259-5-ND, Manufacturer="Texas Instruments", MPN=TL081BCD
U5: "LM2776 Switched Capacitor Inverter", Digikey Part Number=296-43957-1-ND, Manufacturer="Texas Instruments", MPN=LM2776DBVR
UART: "Header, 4-Pin Dual row", LatestRevisionDate=17-Jul-2002, LatestRevisionNote="Re-released for DXP Platform.", Publisher="Altium Limited"
ULTRA: library part CON_4M_PH_TOP_SMT, "CONN HEADER PH TOP 4POS 2MM SMD", Manufacturer=JST, Part Number=B4B-PH-SM4-TB, ComponentLink1Description=Datasheet, ComponentLink1URL=http://www.jst-mfg.com/product/pdf/eng/ePH.pdf
VR1 VR1_1: "IC REG LINEAR 3.3V 1A DPAK", Current Output=1A, Digikey Part Number=NCP1117DT33T5GOSCT-ND, Manufacturer="ON Semiconductor", MPN=NCP1117DT33T5G
VR1_2: "IC REG LINEAR 3.3V 1A DPAK", Current Output=1A, Manufacturer="ON Semiconductor", Part Number=NCP1117DT33T5G
Y1 Y1_1: "CRYSTAL 32MHZ 8PF SMD", Digikey Part Number=1253-1730-1-ND, Manufacturer="Kyocera International Inc. Electronic Components", MPN=CX2520DB32000D0GPSC1, Package="4-SMD, No Lead", Dimensions="0.098\" L x 0.079\" W (2.50mm x 2.00mm)"
Y1_2: "CRYSTAL 32MHZ 8PF SMD", Manufacturer="Kyocera International Inc. Electronic Components", Package="4-SMD, No Lead", Part Number=CX2520DB32000D0GPSC1, Dimensions="0.098\" L x 0.079\" W (2.50mm x 2.00mm)"

## Free pads (board coordinates)
  rect 1.4x1.4 hole 0.89: 1(60.579,69.342)
  round 1.4 hole 0.89: 2(63.119,69.342)
  round 2.55 hole 2.01: MH1(58.039,74.422) MH2(68.199,74.422)

## Via types
v1: diameter 0.711, hole 0.406, Top Layer to Bottom Layer, 99 vias
v2: diameter 0.711, hole 0.406, Top Layer to Bottom Layer, tented both sides, 92 vias
v3: diameter 1.27, hole 0.711, Top Layer to Bottom Layer, 24 vias